# EAGLE board CT_schematic (EAGLE 7.6.0)

Size 100 x 80 mm. Coordinates in mm from the lower left corner, seen from the top.
Outline: 0,0 100,0 100,80 0,80 0,0
Copper layers (1*16): Top 0.035mm / dielectric 1.5mm / Bottom 0.035mm
Design rules "default": minimum track width 10mil, minimum drill 24mil, track to track 8mil, track to pad 8mil, pad to pad 8mil, via to via 8mil, smd to smd 8mil, copper to edge 40mil, drill to drill 8mil, minimum pad ring 10mil, minimum via ring 8mil, stop-mask expansion 4mil, vias tented up to drill 0mil, thermal gap 10mil

## Footprints (pad centres in the part's own frame; a part is rotated, then mirrored left to right if it is on the bottom)
C0603 = smd 0.8 x 0.8: 1 -0.762,0; 2 0.762,0
C0402 = smd 0.5 x 0.5: 1 -0.508,0; 2 0.508,0
C0805 = smd 1.2 x 1.3: 1 -1.016,0; 2 1.016,0
EXV-9H = smd 3.505 x 1.676: 1 -2.857,0; 2 2.857,0
L0603 = smd 0.8 x 0.8: 1 -0.762,0; 2 0.762,0
DR1040 = smd 1.6 x 3.2: 1 -4.458,0; 2 4.458,0
L0806 = smd 1.016 x 1.524: 1 -0.889,0; 2 0.889,0
PJ-037B_PACKAGE = drill 3.7 square: 1 12,0 | drill 3.2 square: 2 6,0
R0603 = smd 0.8 x 0.8: 1 -0.762,0; 2 0.762,0
LQFP100 = smd 0.3 x 1.2: 1 -6,-7.75; 2 -5.5,-7.75; 3 -5,-7.75; 4 -4.5,-7.75; 5 -4,-7.75; 6 -3.5,-7.75; 7 -3,-7.75; 8 -2.5,-7.75; 9 -2,-7.75; 10 -1.5,-7.75; 11 -1,-7.75; 12 -0.5,-7.75; 13 0,-7.75; 14 0.5,-7.75; 15 1,-7.75; 16 1.5,-7.75; 17 2,-7.75; 18 2.5,-7.75; 19 3,-7.75; 20 3.5,-7.75; 21 4,-7.75; 22 4.5,-7.75; 23 5,-7.75; 24 5.5,-7.75; 25 6,-7.75; 51 6,7.75; 52 5.5,7.75; 53 5,7.75; 54 4.5,7.75; 55 4,7.75; 56 3.5,7.75; 57 3,7.75; 58 2.5,7.75; 59 2,7.75; 60 1.5,7.75; 61 1,7.75; 62 0.5,7.75; 63 0,7.75; 64 -0.5,7.75; 65 -1,7.75; 66 -1.5,7.75; 67 -2,7.75; 68 -2.5,7.75; 69 -3,7.75; 70 -3.5,7.75; 71 -4,7.75; 72 -4.5,7.75; 73 -5,7.75; 74 -5.5,7.75; 75 -6,7.75 | smd 1.2 x 0.3: 26 7.75,-6; 27 7.75,-5.5; 28 7.75,-5; 29 7.75,-4.5; 30 7.75,-4; 31 7.75,-3.5; 32 7.75,-3; 33 7.75,-2.5; 34 7.75,-2; 35 7.75,-1.5; 36 7.75,-1; 37 7.75,-0.5; 38 7.75,0; 39 7.75,0.5; 40 7.75,1; 41 7.75,1.5; 42 7.75,2; 43 7.75,2.5; 44 7.75,3; 45 7.75,3.5; 46 7.75,4; 47 7.75,4.5; 48 7.75,5; 49 7.75,5.5; 50 7.75,6; 76 -7.75,6; 77 -7.75,5.5; 78 -7.75,5; 79 -7.75,4.5; 80 -7.75,4; 81 -7.75,3.5; 82 -7.75,3; 83 -7.75,2.5; 84 -7.75,2; 85 -7.75,1.5; 86 -7.75,1; 87 -7.75,0.5; 88 -7.75,0; 89 -7.75,-0.5; 90 -7.75,-1; 91 -7.75,-1.5; 92 -7.75,-2; 93 -7.75,-2.5; 94 -7.75,-3; 95 -7.75,-3.5; 96 -7.75,-4; 97 -7.75,-4.5; 98 -7.75,-5; 99 -7.75,-5.5; 100 -7.75,-6
SOT-23-6 = smd 1.1 x 0.6: 1 -1.4,0.95; 2 -1.4,0; 3 -1.4,-0.95; 4 1.4,-0.95; 5 1.4,0; 6 1.4,0.95
SOIC-8 = smd 1.6 x 0.6: 1 -2.7,1.905 | smd 1.55 x 0.6: 2 -2.7,0.635; 3 -2.7,-0.635; 4 -2.7,-1.905; 5 2.7,-1.905; 6 2.7,-0.635; 7 2.7,0.635; 8 2.7,1.905
TST-110-05-T-D-RA = drill 1 pad 1.7 square: 1 0,0 | drill 1 pad 1.7: 2 0,2.54; 3 2.54,0; 4 2.54,2.54; 5 5.08,0; 6 5.08,2.54; 7 7.62,0; 8 7.62,2.54; 9 10.16,0; 10 10.16,2.54; 11 12.7,0; 12 12.7,2.54; 13 15.24,0; 14 15.24,2.54; 15 17.78,0; 16 17.78,2.54; 17 20.32,0; 18 20.32,2.54; 19 22.86,0; 20 22.86,2.54
TDFN-8/6MM = smd 0.3 x 0.75: 1 0,0; 2 0.5,0; 3 1,0; 4 1.5,0; 5 1.5,3; 6 1,3; 7 0.5,3; 8 0,3
TSSOP20-I = smd 0.4 x 1.35: 1 -2.925,-2.875; 2 -2.275,-2.875; 3 -1.625,-2.875; 4 -0.975,-2.875; 5 -0.325,-2.875; 6 0.325,-2.875; 7 0.975,-2.875; 8 1.625,-2.875; 9 2.275,-2.875; 10 2.925,-2.875; 11 2.925,2.875; 12 2.275,2.875; 13 1.625,2.875; 14 0.975,2.875; 15 0.325,2.875; 16 -0.325,2.875; 17 -0.975,2.875; 18 -1.625,2.875; 19 -2.275,2.875; 20 -2.925,2.875
182-009-MALE = drill 1.194 pad 1.524 octagon: 1 -5.537,10.923; 2 -2.769,10.923; 3 0,10.923; 4 2.769,10.923; 5 5.537,10.923; 6 -4.153,8.08; 7 -1.384,8.08; 8 1.384,8.08; 9 4.153,8.08 | hole 3.048: -12.446,9.501; 12.446,9.501
XCVR_SPBTLE-RF = smd 1.6 x 1: 1 -6.75,0.33; 2 -6.75,-0.94; 3 -6.75,-2.21; 4 -6.75,-3.48; 5 -6.75,-4.75; 7 6.75,-4.75; 8 6.75,-3.48; 9 6.75,-2.21; 10 6.75,-0.94; 11 6.75,0.33 | smd 1 x 1.6: 6 -2.75,-5.75
MICRO_USB_AB = smd 0.4 x 1.35: 1 1.3,0.26; 2 0.65,0.26; 3 0,0.26; 4 -0.65,0.26; 5 -1.3,0.26 | drill 0.6 pad 0.95 long: 6 4.175,-2.54; 7 -4.175,-2.54 | drill 0.7 pad 1.1 long: 8 -2.225,0.46; 9 2.225,0.46
SOT143B = smd 1 x 0.7: 1 -0.75,-1 | smd 0.6 x 0.7: 2 0.95,-1; 3 0.95,1; 4 -0.95,1
ABLS-25.000MHZ-B2F-T = smd 5.6 x 2.8: 1 -3.81,0; 2 5.69,0
ASEK = smd 1.4 x 1: 1 -1.1,-0.8; 2 1.1,-0.8; 3 1.1,0.8; 4 -1.1,0.8
TSOT-23-5 = smd 1.3 x 0.62: 1 -1.31,0.95; 2 -1.31,0; 3 -1.31,-0.95; 4 1.31,-0.95; 5 1.31,0.95
MSOP-8 = smd 1.499 x 0.432: 1 -2.184,0.965; 2 -2.184,0.33; 3 -2.184,-0.33; 4 -2.184,-0.965; 5 2.184,-0.965; 6 2.184,-0.33; 7 2.184,0.33; 8 2.184,0.965
SON-6 = smd 0.55 x 0.3: 1 -0.355,0.5 | smd 0.52 x 0.3: 2 -0.37,0; 3 -0.37,-0.5; 4 0.37,-0.5; 5 0.37,0; 6 0.37,0.5
SW_4-1437565-2 = smd 1.4 x 2.1: 1 -2.23,4.55; 2 -2.23,-4.55; 3 2.23,4.55; 4 2.23,-4.55
LGM67K-G1J2-24-Z = smd 0.8 x 1.4: A -2,0; C 0,0
NC7SZ125M5X = smd 1.3 x 0.7: 1 -1.3,0.95; 2 -1.3,0; 3 -1.3,-0.95; 4 1.3,-0.95; 5 1.3,0.95

## Placement (x,y rotation side)
C1  1e-06  [C0603]  -69.85,83.82 0 top  (outside the outline)
C2  1e-07  [C0603]  -73.66,83.82 0 top  (outside the outline)
C3  1e-07  [C0603]  -77.47,83.82 0 top  (outside the outline)
C4  1e-07  [C0603]  -81.28,83.82 0 top  (outside the outline)
C5  1e-07  [C0603]  -85.09,83.82 0 top  (outside the outline)
C6  1e-07  [C0603]  -15.24,88.9 0 top  (outside the outline)
C7  1e-07  [C0603]  -19.05,88.9 0 top  (outside the outline)
C8  4.7e-06  [C0603]  -54.61,83.82 0 top  (outside the outline)
C9  2.2e-06  [C0603]  -58.42,83.82 0 top  (outside the outline)
C10  2.2e-06  [C0603]  -62.23,83.82 0 top  (outside the outline)
C11  1e-08  [C0603]  -22.86,88.9 0 top  (outside the outline)
C12  1e-06  [C0603]  -26.67,88.9 0 top  (outside the outline)
C13  1e-11  [C0402]  -64.77,88.9 0 top  (outside the outline)
C14  1e-11  [C0402]  -68.58,88.9 0 top  (outside the outline)
C15  1e-08  [C0402]  -72.39,88.9 0 top  (outside the outline)
C16  1e-07  [C0402]  -76.2,88.9 0 top  (outside the outline)
C17  1e-07  [C0402]  -80.01,88.9 0 top  (outside the outline)
C18  1e-08  [C0402]  -83.82,88.9 0 top  (outside the outline)
C19  1e-07  [C0402]  -15.24,93.98 0 top  (outside the outline)
C20  1e-07  [C0402]  -19.05,93.98 0 top  (outside the outline)
C21  1e-07  [C0402]  -22.86,93.98 0 top  (outside the outline)
C22  1e-07  [C0402]  -26.67,93.98 0 top  (outside the outline)
C23  1e-07  [C0402]  -30.48,93.98 0 top  (outside the outline)
C24  1e-07  [C0402]  -34.29,93.98 0 top  (outside the outline)
C25  1e-06  [C0603]  -30.48,88.9 0 top  (outside the outline)
C26  1e-07  [C0402]  -38.1,93.98 0 top  (outside the outline)
C27  1e-08  [C0402]  -41.91,93.98 0 top  (outside the outline)
C28  1e-05  [C0805]  -27.94,72.39 0 top  (outside the outline)
C29  1e-05  [C0805]  -33.02,72.39 0 top  (outside the outline)
C30  1e-06  [C0603]  -34.29,88.9 0 top  (outside the outline)
C31  1e-05  [C0805]  -38.1,72.39 0 top  (outside the outline)
C32  1e-05  [C0805]  -43.18,72.39 0 top  (outside the outline)
C33  1.6e-09  [C0603]  -66.04,83.82 0 top  (outside the outline)
C34  1e-07  [C0402]  -45.72,93.98 0 top  (outside the outline)
C35  0.0001  [EXV-9H]  -17.78,66.04 0 top  (outside the outline)
C36  0.0001  [EXV-9H]  -29.21,66.04 0 top  (outside the outline)
C37  1e-08  [C0402]  -49.53,93.98 0 top  (outside the outline)
C38  1e-08  [C0402]  -53.34,93.98 0 top  (outside the outline)
C39  1e-08  [C0402]  -57.15,93.98 0 top  (outside the outline)
F1  240.0  [L0603]  -38.1,88.9 0 top  (outside the outline)
I1  5.2e-06  [DR1040]  -57.15,45.72 0 top  (outside the outline)
I2  3.3e-06  [L0806]  -71.12,64.77 0 top  (outside the outline)
J1  PJ-037B  [PJ-037B_PACKAGE]  -48.26,29.21 0 top  (outside the outline)
R2  1000.0  [R0603]  -41.91,88.9 0 top  (outside the outline)
R4  4700.0  [R0603]  -45.72,88.9 0 top  (outside the outline)
R5  4700.0  [R0603]  -49.53,88.9 0 top  (outside the outline)
R6  2200.0  [R0603]  -53.34,88.9 0 top  (outside the outline)
R7  2200.0  [R0603]  -57.15,88.9 0 top  (outside the outline)
R8  47000.0  [R0603]  -81.28,72.39 0 top  (outside the outline)
R9  10000.0  [R0603]  -15.24,78.74 0 top  (outside the outline)
R10  10000.0  [R0603]  -20.32,78.74 0 top  (outside the outline)
R11  10000.0  [R0603]  -25.4,78.74 0 top  (outside the outline)
R12  10000.0  [R0603]  -30.48,78.74 0 top  (outside the outline)
R13  10000.0  [R0603]  -35.56,78.74 0 top  (outside the outline)
R14  10000.0  [R0603]  -40.64,78.74 0 top  (outside the outline)
R15  10000.0  [R0603]  -45.72,78.74 0 top  (outside the outline)
R16  10000.0  [R0603]  -50.8,78.74 0 top  (outside the outline)
R17  10000.0  [R0603]  -55.88,78.74 0 top  (outside the outline)
R18  10000.0  [R0603]  -60.96,78.74 0 top  (outside the outline)
R19  10000.0  [R0603]  -66.04,78.74 0 top  (outside the outline)
R20  10000.0  [R0603]  -71.12,78.74 0 top  (outside the outline)
R21  10000.0  [R0603]  -76.2,78.74 0 top  (outside the outline)
R22  10000.0  [R0603]  -81.28,78.74 0 top  (outside the outline)
R23  10000.0  [R0603]  -15.24,83.82 0 top  (outside the outline)
R24  10000.0  [R0603]  -20.32,83.82 0 top  (outside the outline)
R25  100000.0  [R0603]  -60.96,72.39 0 top  (outside the outline)
R26  47000.0  [R0603]  -25.4,83.82 0 top  (outside the outline)
R27  220000.0  [R0603]  -66.04,72.39 0 top  (outside the outline)
R28  1000000.0  [R0603]  -55.88,72.39 0 top  (outside the outline)
R29  47000.0  [R0603]  -30.48,83.82 0 top  (outside the outline)
R30  56000.0  [R0603]  -35.56,83.82 0 top  (outside the outline)
R31  18000.0  [R0603]  -40.64,83.82 0 top  (outside the outline)
R32  10000.0  [R0603]  -45.72,83.82 0 top  (outside the outline)
R33  10000.0  [R0603]  -50.8,83.82 0 top  (outside the outline)
R34  9100.0  [R0603]  -60.96,88.9 0 top  (outside the outline)
R35  680000.0  [R0603]  -71.12,72.39 0 top  (outside the outline)
R36  120000.0  [R0603]  -76.2,72.39 0 top  (outside the outline)
U1  STM32F767VIT6  [LQFP100]  -24.13,31.75 0 top  (outside the outline)
U2  MAX4995AAUT+T  [SOT-23-6]  -76.2,63.5 0 top  (outside the outline)
U3  AT25020B-SSHL-T  [SOIC-8]  -24.13,57.15 0 top  (outside the outline)
U4  TST-110-05-T-D-RA  [TST-110-05-T-D-RA]  -63.5,53.34 0 top  (outside the outline)
U5  24AA64T-I/MNY  [TDFN-8/6MM]  -73.66,44.45 0 top  (outside the outline)
U6  SP3203ECY-L/TR  [TSSOP20-I]  -46.99,45.72 0 top  (outside the outline)
U7  182-009-113R531  [182-009-MALE]  -36.83,6.35 0 top  (outside the outline)
U8  SPBTLE-RF  [XCVR_SPBTLE-RF]  -60.96,10.16 0 top  (outside the outline)
U9  47590-0001  [MICRO_USB_AB]  -57.15,30.48 0 top  (outside the outline)
U10  prtr5v0u2ax  [SOT143B]  -69.85,93.98 0 top  (outside the outline)
U11  ABLS-25.000MHZ-B2F-T  [ABLS-25.000MHZ-B2F-T]  -48.26,66.04 0 top  (outside the outline)
U12  ASEK-32.768KHz-ECST  [ASEK]  -82.55,55.88 0 top  (outside the outline)
U13  ltc3406es5  [TSOT-23-5]  -48.26,72.39 0 top  (outside the outline)
U14  TPS61085DGKR  [MSOP-8]  -31.75,45.72 0 top  (outside the outline)
U15  TPS3895ADRYR  [SON-6]  -73.66,92.71 0 top  (outside the outline)
U16  4-1437565-2  [SW_4-1437565-2]  -77.47,27.94 0 top  (outside the outline)
U17  Q65110A2395  [LGM67K-G1J2-24-Z]  -59.69,64.77 0 top  (outside the outline)
U18  nc7sz125m5x  [NC7SZ125M5X]  -81.28,63.5 0 top  (outside the outline)
U19  nc7sz125m5x  [NC7SZ125M5X]  -15.24,72.39 0 top  (outside the outline)
U20  nc7sz125m5x  [NC7SZ125M5X]  -21.59,72.39 0 top  (outside the outline)

## Library data of the parts
C1-C39 F1 I1 I2 J1 R2 R4-R36 U1-U20 = circuit_tree

## Nets
CLK_CRYSTAL_U1_12: C13.1 U1.12 U11.1
CLK_CRYSTAL_U1_13: C14.1 U1.13 U11.2
CLK_U1_8: U1.8 U12.3
GND: C1.2 C2.2 C3.2 C4.2 C5.2 C6.2 C7.2 C8.2 C9.2 C10.2 C11.2 C12.2 C13.2 C14.2 C15.2 C16.2 C17.2 C18.2 C19.2 C20.2 C23.2 C24.2 C25.2 C26.2 C27.2 C28.2 C29.1 C29.2 C30.2 C31.2 C32.1 C32.2 C33.1 C33.2 C34.2 C35.2 C36.2 C37.2 C38.2 C39.2 J1.2 R2.2 R8.2 R9.2 R11.2 R20.2 R23.2 R25.2 R26.2 R27.2 R31.2 R34.2 R36.2 U1.10 U1.19 U1.26 U1.49 U1.74 U1.99 U2.2 U3.4 U4.4 U4.6 U4.8 U4.10 U4.12 U4.14 U4.16 U4.18 U4.20 U5.4 U6.18 U7.5 U8.6 U9.5 U9.6 U9.7 U9.8 U9.9 U10.1 U12.2 U13.2 U14.4 U15.2 U17.C U18.2 U18.3 U19.1 U19.3 U20.1 U20.3
NET_U1_14: R5.1 U1.14 U20.4
NET_U1_21: C11.1 C12.1 F1.1 U1.20 U1.21
NET_U1_48: C9.1 U1.48
NET_U1_73: C10.1 U1.73
NET_U1_92: R6.1 U1.92 U5.6
NET_U1_93: R7.1 U1.93 U5.5
NET_U1_94: R9.1 U1.94
NET_U1_97: U17.A
NET_U1_98: U16.3 U16.4
NET_U2_3: R8.1 U2.3
NET_U3_3: R12.1 U3.3
NET_U3_7: R14.1 U3.7
NET_U4_19: R20.1 U4.19
NET_U5_1: R21.1 U5.1
NET_U5_2: R22.1 U5.2
NET_U5_3: R23.1 U5.3
NET_U6_1: C21.1 U6.1
NET_U6_2: C23.1 U6.2
NET_U6_3: C21.2 U6.3
NET_U6_4: C22.1 U6.4
NET_U6_5: C22.2 U6.5
NET_U6_6: C24.1 U6.6
NET_U6_20: U6.20
NET_U7_2: U6.14 U7.2
NET_U7_3: U6.17 U7.3
NET_U7_7: U6.13 U7.7
NET_U7_8: U6.16 U7.8
NET_U8_11: R4.1 U8.11 U19.4
NET_U13_1: U13.1
NET_U13_3: I1.1 U13.3
NET_U13_5: R27.1 R28.1 U13.5
NET_U13_ATNET_3: I1.2 R28.2
NET_U14_1: R29.1 U14.1
NET_U14_2: R30.1 R31.1 U14.2
NET_U14_3: U14.3
NET_U14_5: I2.1 U14.5
NET_U14_7: U14.7
NET_U14_ATNET_3: R30.2
NET_U14_ATNET_4: R29.2
NET_U15_1: R33.1 R34.1 U15.1
NET_U15_3: R35.2 R36.1 U15.3
NET_U15_4: R32.1 U15.4 U18.4 U19.2 U20.2
NET_U16_1: R2.1 U16.1 U16.2
PROC_GPIO_TO_U1_USB_FAULT: R10.1 U1.2 U2.6
PROC_GPIO_TO_U1_VBUS_EN: R11.1 U1.1 U2.4
PROC_GPIO_TO_U8_SPI_IRQ: R26.1 U1.3 U8.4
PROC_SPI1_MISO: U1.30 U8.8
PROC_SPI1_MOSI: U1.31 U8.9
PROC_SPI1_NSS: R24.1 U1.28 U8.10
PROC_SPI1_SCK: R25.1 U1.29 U8.7
PROC_SPI2_MISO: U1.17 U3.2
PROC_SPI2_MOSI: U1.16 U3.5
PROC_SPI2_NSS: R13.1 U1.51 U3.1
PROC_SPI2_SCK: U1.46 U3.6
PROC_SYS_JTCK_SWCLK: R18.1 U1.76 U4.9
PROC_SYS_JTDI: R16.1 U1.77 U4.5
PROC_SYS_JTDO_SWO: U1.89 U4.13
PROC_SYS_JTMS_SWDIO: R17.1 U1.72 U4.7
PROC_SYS_JTRST: R15.1 U1.90 U4.3
PROC_UART4_CTS: U1.34 U6.8
PROC_UART4_RTS: U1.53 U6.10
PROC_UART4_RX: U1.23 U6.11
PROC_UART4_TX: U1.22 U6.7
PROC_USB_OTG_FS_DM: U1.70 U9.2 U10.3
PROC_USB_OTG_FS_DP: U1.71 U9.3 U10.2
PROC_USB_OTG_FS_ID: U1.69 U9.4
PROC_USB_OTG_FS_VBUS: U1.68 U2.1 U9.1 U10.4
RST_OUT_U4_SRESET_B: R19.1 U4.15 U18.1
VCC_S1_4V8: C28.1 C30.1 C31.1 C35.1 C36.1 I2.2 J1.1 U13.4 U14.3 U14.6
VCC_TIER1_3V3: C1.1 C2.1 C3.1 C4.1 C5.1 C6.1 C7.1 C8.1 C15.1 C16.1 C17.1 C18.1 C19.1 C20.1 C25.1 C26.1 C27.1 C29.2 C34.1 C37.1 C38.1 C39.1 F1.2 I1.2 R4.2 R5.2 R6.2 R7.2 R10.2 R12.2 R13.2 R14.2 R15.2 R16.2 R17.2 R18.2 R19.2 R21.2 R22.2 R24.2 R28.2 R32.2 R33.2 R35.1 U1.6 U1.11 U1.27 U1.50 U1.75 U1.100 U3.8 U4.1 U4.2 U5.7 U5.8 U6.12 U6.19 U8.5 U12.4 U15.6 U18.5 U19.5 U20.5
VCC_TIER1_5V0: C32.2 R30.2 U2.5

## Tracks (layer width: path | path; a pad name or v marks a point on that pad's centre or on a via)
CLK_CRYSTAL_U1_12  (2 unrouted)
CLK_CRYSTAL_U1_13  (2 unrouted)
CLK_U1_8  (1 unrouted)
GND  (90 unrouted)
NET_U1_14  (2 unrouted)
NET_U1_21  (4 unrouted)
NET_U1_48  (1 unrouted)
NET_U1_73  (1 unrouted)
NET_U1_92  (2 unrouted)
NET_U1_93  (2 unrouted)
NET_U1_94  (1 unrouted)
NET_U1_98  (1 unrouted)
NET_U2_3  (1 unrouted)
NET_U3_3  (1 unrouted)
NET_U3_7  (1 unrouted)
NET_U4_19  (1 unrouted)
NET_U5_1  (1 unrouted)
NET_U5_2  (1 unrouted)
NET_U5_3  (1 unrouted)
NET_U6_1  (1 unrouted)
NET_U6_2  (1 unrouted)
NET_U6_3  (1 unrouted)
NET_U6_4  (1 unrouted)
NET_U6_5  (1 unrouted)
NET_U6_6  (1 unrouted)
NET_U7_2  (1 unrouted)
NET_U7_3  (1 unrouted)
NET_U7_7  (1 unrouted)
NET_U7_8  (1 unrouted)
NET_U8_11  (2 unrouted)
NET_U13_3  (1 unrouted)
NET_U13_5  (2 unrouted)
NET_U13_ATNET_3  (1 unrouted)
NET_U14_1  (1 unrouted)
NET_U14_2  (2 unrouted)
NET_U14_5  (1 unrouted)
NET_U15_1  (2 unrouted)
NET_U15_3  (2 unrouted)
NET_U15_4  (4 unrouted)
NET_U16_1  (2 unrouted)
PROC_GPIO_TO_U1_USB_FAULT  (2 unrouted)
PROC_GPIO_TO_U1_VBUS_EN  (2 unrouted)
PROC_GPIO_TO_U8_SPI_IRQ  (2 unrouted)
PROC_SPI1_MISO  (1 unrouted)
PROC_SPI1_MOSI  (1 unrouted)
PROC_SPI1_NSS  (2 unrouted)
PROC_SPI1_SCK  (2 unrouted)
PROC_SPI2_MISO  (1 unrouted)
PROC_SPI2_MOSI  (1 unrouted)
PROC_SPI2_NSS  (2 unrouted)
PROC_SPI2_SCK  (1 unrouted)
PROC_SYS_JTCK_SWCLK  (2 unrouted)
PROC_SYS_JTDI  (2 unrouted)
PROC_SYS_JTDO_SWO  (1 unrouted)
PROC_SYS_JTMS_SWDIO  (2 unrouted)
PROC_SYS_JTRST  (2 unrouted)
PROC_UART4_CTS  (1 unrouted)
PROC_UART4_RTS  (1 unrouted)
PROC_UART4_RX  (1 unrouted)
PROC_UART4_TX  (1 unrouted)
PROC_USB_OTG_FS_DM  (2 unrouted)
PROC_USB_OTG_FS_DP  (2 unrouted)
PROC_USB_OTG_FS_ID  (1 unrouted)
PROC_USB_OTG_FS_VBUS  (3 unrouted)
RST_OUT_U4_SRESET_B  (2 unrouted)
VCC_S1_4V8  (9 unrouted)
VCC_TIER1_3V3  (62 unrouted)
VCC_TIER1_5V0  (2 unrouted)